# Altium PCB PCB1.PcbDoc
Units mil, origin at the board's own origin, x right, y up, seen from the top; angles counter-clockwise.
Board outline 3149.61 x 1574.8 mil, 2 copper layers (Top Layer, Bottom Layer); 15 components, 12 nets, 41 pads, 0 vias.
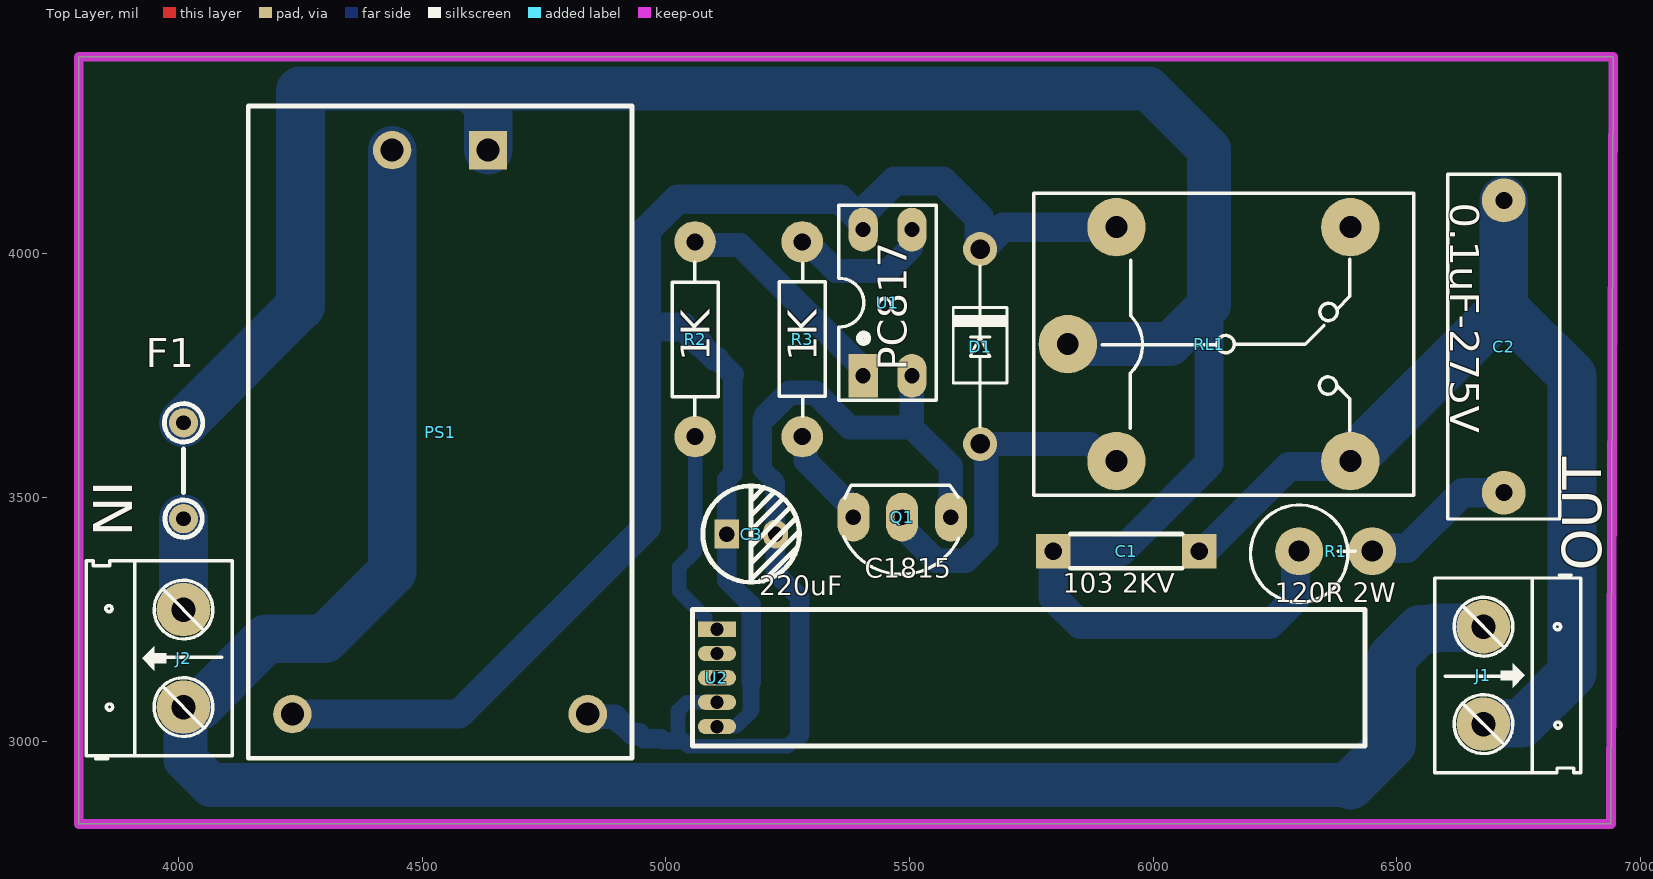
[diagram p0: Top Layer view]
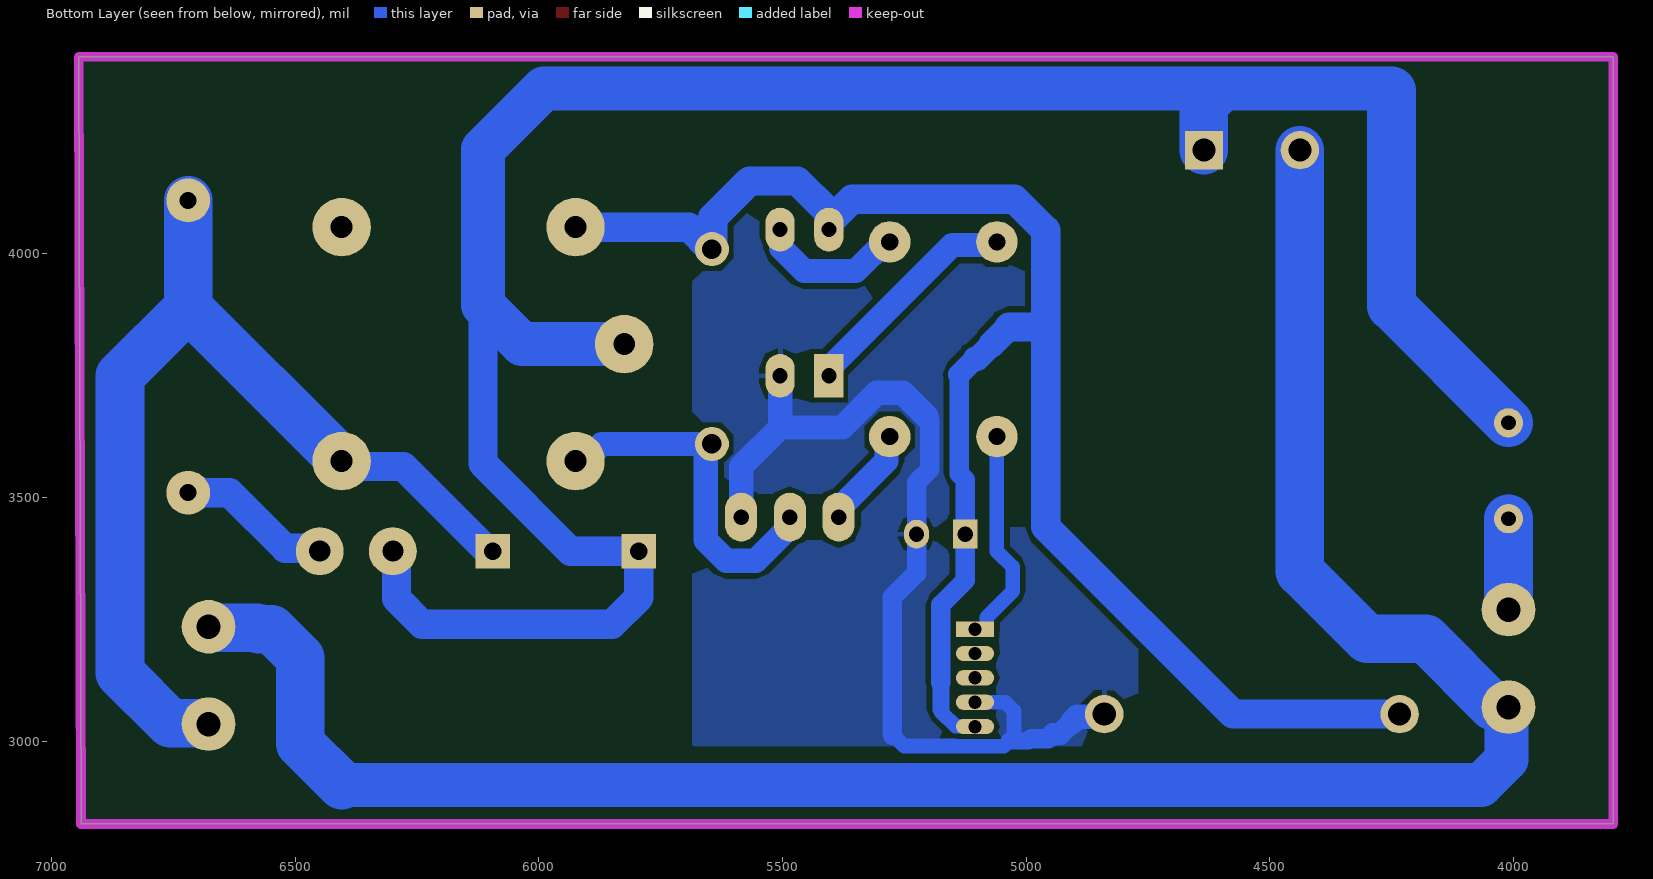
[diagram p1: Bottom Layer view, seen from below]
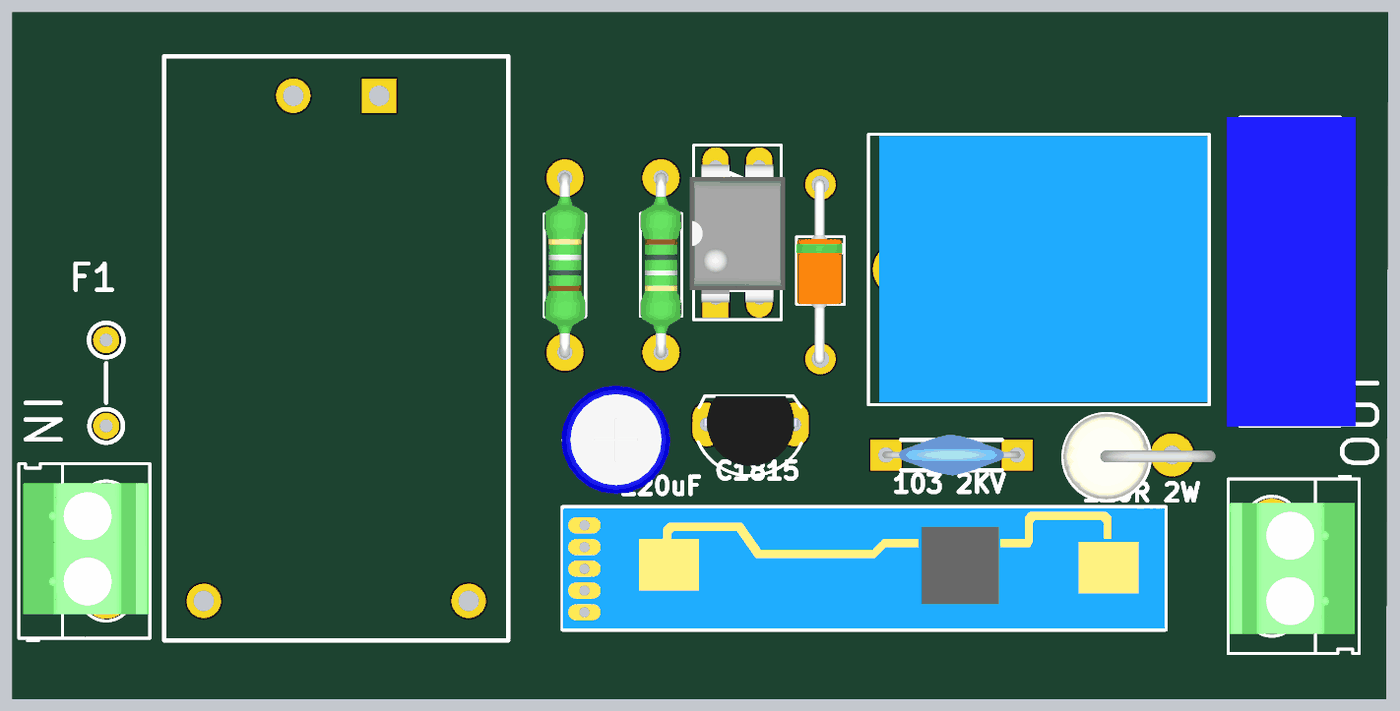
[diagram p2: 3D render of the assembled board from above, using the file's embedded part models]

## Layer stack, top to bottom
Top Solder: solder mask 0.4, Solder Resist, Dk 3.5
Top Layer: signal copper 1.4
Dielectric 1: dielectric 12.6, FR-4, Dk 4.8
Bottom Layer: signal copper 1.4
Bottom Solder: solder mask 0.4, Solder Resist, Dk 3.5

## Board outline
3795,2830 3795,4404.8 6944.61,4404.8 6940,2830

## Design rules (kind name [scope] priority, off if disabled: settings)
Clearance [All] p1: gap=10 ignorepadtopadclearanceinfootprint=FALSE ismatrix=TRUE
PolygonConnect [All] p1: connectstyle=Relief reliefconductorwidth=10 reliefentries=4 polygonreliefangle="90 Angle" airgapwidth=10
RoutingLayers [All] p1: top layer_v5=FALSE bottom layer_v5=TRUE
RoutingVias [All] p1: holewidth=28 width=50 viastyle="Through Hole" minholewidth=28 minwidth=50 maxholewidth=28 maxwidth=50
SolderMaskExpansion [All] p1: expansion=4 istentingtop=FALSE
Width MaxMinWidth_1 [InNet('NetC1_2')] p1: maxlimit=100 minlimit=40 preferedwidth=100 minimp=50.000000 maximp=50.000000 favimp=50.000000
Width MaxMinWidth_2 [InNet('AC1')] p2: maxlimit=100 minlimit=40 preferedwidth=80 minimp=50.000000 maximp=50.000000 favimp=50.000000
Width MaxMinWidth_3 [InNet('AC2')] p3: maxlimit=100 minlimit=40 preferedwidth=80 minimp=50.000000 maximp=50.000000 favimp=50.000000
Width MaxMinWidth_4 [InNet('NetC2_1')] p4: maxlimit=100 minlimit=40 preferedwidth=80 minimp=50.000000 maximp=50.000000 favimp=50.000000
Width MaxMinWidth_5 [InNet('NetF1_1')] p5: maxlimit=100 minlimit=30 preferedwidth=80 minimp=50.000000 maximp=50.000000 favimp=50.000000
Width [All] p6: maxlimit=60 minlimit=30 preferedwidth=50
29 further rules are at their usual default settings.

## Components (designator, comment, footprint, x,y, rotation, side; value= is the part's Value field where it differs from the comment)
C1 "103 2KV" "Cap 7.5mm" 5795,3390 r0 top
C2 "0.1uF-275V" "Cap 15mm" 6720,4110 r270 top
C3 "220uF" "Tu hoa 5mm" 5175,3425 r0 top
D1 "Diode" DIO-1A 5645,3610 r90 top value=1N5007
F1 "10A" "Fuse vertical" 4010,3555 r90 top value=Fuse
J1 "CON 2 KF301" "Con 2 KF301 5.08" 6678.22,3235 r270 top
J2 "CON 2 KF301" "Con 2 KF301 5.08" 4010,3070 r90 top
PS1 "HLK-PM01 5V" CONV_HLK-PM01 4536.57,4213.03 r270 top
Q1 "C1815" TO92-123 5485,3460 r180 top
R1 "120R 2W" R2WD 6500,3390 r180 top
R2 "1K" RES-1/4W 5055,3810 r270 top
R3 "1K" RES-1/4W 5285,3840 r90 top
RL1 "Relay 10A/12V" "RELAY 5" 6150,3815 r0 top value="Relay SPDT, 10A, 12V"
U1 "PC817" DIP4 5405,3747.48 r0 top
U2 "HLK-LD2410" HLK-LD2410 5125,3335 r270 top

## Footprints (in the part's own frame and the unit in brackets; to place one, negate y for a bottom-side part, rotate by r counter-clockwise, add the part's x,y. Pads: shape width x height; smd on the part's side, far side on the other; paste and mask are expansions set on the pad)
"Cap 7.5mm" [mm] "103 2KV"
  rect 1.8x1.8 hole 0.9: 1(0,0) 2(7.62,0)
  silkscreen extent 0.89,-0.89 6.73,0.89, body extent -0.19,-1.2 7.81,1.19, height 9.03
"Cap 15mm" [mil]
  round 90 hole 35: 1(0,0) 2(600,0)
  silkscreen extent -54,-115 654,115, body extent -54,-145 654,150, height 731
"Con 2 KF301 5.08" [mil]
  round 110 hole 50: 1(0,0) 2(200,0)
  silkscreen extent -106,-100 300,200, body extent -45,-97 255,190, height 335
CONV_HLK-PM01 [mm]
  rect 2x2 hole 1.2: 1(0,2.5)
  round 2 hole 1.2: 2(0,-2.5) 3(29.4,7.7) 4(29.4,-7.7)
  silkscreen extent -2.3,-10 31.7,10, body extent -2.29,-10.1 31.71,10.1, height 15.3
DIO-1A [mil]
  round 70 hole 40: 1(0,0) 2(400,0)
  silkscreen extent 35,-55 365,55, body extent -11,-50 411,54, height 102
DIP4 [mil] "W.300/L.400"
  rect 60x90 hole 31: 1(0,2.52)
  oval 60x90 hole 31: 2(100,2.52) 3(100,302.52) 4(0,302.52)
  silkscreen extent -50,-47 150,353, body extent -59,-7 159,307, height 170
"Fuse vertical" [mil] "d=5mm"
  round 60 hole 30: 1(-98.43,0) 2(98.43,0)
  silkscreen extent -137,-40 138,39, body extent -73,-85 183,88, height 650
HLK-LD2410 [mm]
  rect 0.8x2 hole 0.7: 1(2.667,-0.508)
  oval 0.8x2 hole 0.7: 2(3.937,-0.508) 3(5.207,-0.508) 4(6.477,-0.508) 5(7.747,-0.508)
  silkscreen extent 1.65,-1.78 8.76,33.27, body extent 1.71,-1.78 8.71,33.22, height 2.1
R2WD [mm] "R2W, 2 pin, 150mil"
  round 2.5 hole 1.1: 1(1.27,0) 2(5.08,0)
  silkscreen extent 2.16,-2.41 7.62,2.66, body extent -1.25,-2.41 7.6,2.59, height 13.97
"RELAY 5" [mil] "Reley DPDT, 8 pin, 1A, W400mil, L800mil,H 300mil"
  round 120 hole 45: 1(-325,0) 2(255,240) 3(255,-240) 4(-225,-240) 5(-225,240)
  silkscreen extent -395,-310 385,310, body extent -371,-304 381,306, height 602
RES-1/4W [mil]
  round 85 hole 35: 1(-215,5) 2(185,5)
  silkscreen extent -173,-42 141,52, body extent -227,-42 197,52, height 95
TO92-123 [mil] "TO-92"
  oval 66x100 hole 32: 1(-100,0) 2(0,0) 3(100,0)
  silkscreen extent -117,-65 120,118, body extent -109,-66 109,95, height 245
"Tu hoa 5mm" [mm]
  rect 1.3x1.5 hole 0.8: 1(-1.27,0)
  oval 1.3x1.5 hole 0.8: 2(1.27,0)
  silkscreen extent -2.51,-2.51 2.51,2.51, body extent -3.12,-3.18 3.23,3.18, height 14.55

## Part data
C1: library part "Cap 103 2KV", "Capacitor Ceramic 2KV"
C2: library part CN, "Capacitor"
C3: library part "Tu Hoa 220uF 16V 6x11", "Cắm", Chung_Loai=Cắm, Don_Vi=Con, Ma_Hang=MH001348, So_Chan=2, Ten_Linh_Kien="Tụ Hóa 220uF 16V 6x11MM"
D1: "Default Diode", Code - JEDEC=DO-214-AB, Published=8-Jun-2000, Publisher="Altium Limited", Revision="July-2002: Re-released for DXP Platform."
F1: library part Fuse, "Fuse", Designed by=VanDungEvn
J1 J2: "Cắm", Chung_Loai=Cắm, Don_Vi=Con, Ma_Hang=MH000987, Ten_Linh_Kien="CON 2 KF301-2P 5.08MM Xanh Dương"
PS1: library part "CONV HLK-PM01", "220VAC to 5V 3W", Package="Non-Standard Hi-link", Availability="Not in stock", Check_prices=https://www.snapeda.com/parts/HLK-20M12/Hi-link/view-part/?ref=eda, MF=Hi-link, MP=HLK-20M12, Price=None, SnapEDA_Link=https://www.snapeda.com/parts/HLK-20M12/Hi-link/view-part/?ref=snap
Q1: library part 2SC1815, "NPN 600mW, ECB"
R1 R2 R3: library part Res
RL1: library part "Relay 5", "Relay SPDT,10A - 12VDC 5 Pin"
U1: library part "OPTO PC817 DIP4", "Single Opto"
U2: "HLK-LD2410B-P Cam bien hien dien"

## Nets (pads, with @x,y where several pads share a name; then routed paths per layer and width w, separated by ;. In a path a pad name is that pad's centre, name@x,y a point inside that pad or via, vN(x,y) a via of type N, cw(c..) or ccw(c..) an arc to the next point about the centre after c; other vN are vias at no path point)
+5: C3.1 D1.2 PS1.4 RL1.5 U1.4 U2.5 | length 3703.3
  Bottom Layer w30: U2.5 5105.29,3030.29 5144.71,3030.29 5175,3060.57 5175,3065.57
  Bottom Layer w35: 5175,3065.57 5175,3120
  Bottom Layer w40: 5137.5,3752.5 5137.5,3549.27 5125,3536.77 C3.1 5125,3330 5175,3280 5175,3120
  Bottom Layer w45: 5105,3785 5137.5,3752.5
  Bottom Layer w50: 5070,3815 5100,3785 5105,3785
  Bottom Layer w55: 5035,3850 5070,3815
  Bottom Layer w60: PS1.4@4233.7,3055.55 4575.55,3055.55 4960,3440 4960,3860 ; 5035,3850 4970,3850 4960,3860 ; U1.4 U1.4@5405,4065 ; RL1.5 5692.71,4055 5647.71,4010 D1.2 5643.09,4011.91 5643.09,4074.85 5567.94,4150 5470,4150 5405,4085 U1.4@5405,4065 ; 4960,3860 4960,4048.74 5023.76,4112.5 5357.5,4112.5 U1.4@5405,4065
AC1: C1.1 F1.2 PS1.1 R1.2 RL1.1 | length 4954.1
  Bottom Layer w60: 6115,3895 6115,3570 5935,3390 C1.1 5795,3295 5850,3240 6240,3240 6292.65,3292.65 6292.65,3382.65 R1.2
  Bottom Layer w80: RL1.1 RL1.1@5832.65,3807.35
  Bottom Layer w90: 4250,4334.8 4255,4339.8 4595.2,4339.8 ; 4635.28,4299.72 4595.2,4339.8 ; RL1.1 6035,3815 6115,3895 6115,4215 5990.2,4339.8 4595.2,4339.8
  Bottom Layer w100: F1.2 4250,3893.43 4250,4334.8 ; PS1.1@4635.28,4213.03 4635.28,4299.72
AC2: J1.1 J2.1 PS1.2 | length 4441.4
  Bottom Layer w90: J2.1 4013.83,3066.17 4013.83,2962.72 4066.55,2910 6405,2910
  Bottom Layer w100: J2.1 4011.91,3071.91 4041.91,3071.91 4180,3210 4300,3210 4438.43,3348.43 PS1.2@4438.43,4213.03 ; 6405,2910 6490,2995 6490,3171.42 6548.58,3230 6575,3230 6578.09,3233.09 6676.31,3233.09 J1.1
GND: C3.2 PS1.3 Q1.1 U1.2 U2.4 | length 1976.8
  Bottom Layer w30: 5025,3000 5025,3062.14 5042.57,3079.71 5104.71,3079.71 U2.4 ; 5035,3000 5045.75,2989.25 5145.5,2989.25 5146.25,2990 5250,2990 5275,3015
  Bottom Layer w35: 4990,3005 4995,3000 5035,3000 ; 5275,3010 5275,3015
  Bottom Layer w40: 4945,3015 4955,3005 4990,3005 ; 5197.5,3659.17 5197.5,3558.08 5225,3530.58 C3.2 5225,3345 5275,3295 5275,3015
  Bottom Layer w45: 4905,3040 4930,3015 4945,3015
  Bottom Layer w50: PS1.3 4845.22,3050.05 4894.95,3050.05 4905,3040 ; 5205,3666.67 5253.33,3715 5306.67,3715 5377.74,3643.93 5505,3643.93 ; U1.2 5505,3643.93 ; Q1.1 5585,3563.93 5505,3643.93
IN: R2.2 U2.1 | length 462.7
  Bottom Layer w30: R2.2@5080,3625 5060,3605 5060,3390 5027.5,3357.5 5027.5,3307.5 5080.63,3254.37 5080.63,3230.75 5081.38,3230 U2.1
NetC1_2: C1.2 C2.1 J1.2 RL1.3 | length 2085.4
  Bottom Layer w60: C1.2 6100.43,3395.43 6110.43,3395.43 6278.52,3563.52 6393.52,3563.52 RL1.3
  Bottom Layer w100: RL1.3 6720,3890 ; J1.2 6680.14,3036.91 6756.91,3036.91 6860,3140 6860,3750 6720,3890 ; C2.1 6720,3890
NetC2_2: C2.2 R1.1 | length 319.7
  Bottom Layer w60: R1.1 6455.94,3395.94 6520.94,3395.94 6635,3510 C2.2
NetD1_1: D1.1 Q1.2 RL1.4 | length 713.2
  Bottom Layer w50: Q1.2 5485,3439.76 5554.76,3370 5615.24,3370 5658,3412.76 D1.1@5658,3591.59 ; D1.1 5871.06,3610 5906.06,3575 RL1.4
NetF1_1: F1.1 J2.2 | length 186.6
  Bottom Layer w100: J2.2 F1.1
NetQ1_3: Q1.3 R3.1 | length 208.5
  Bottom Layer w50: R3.1 5286.7,3618.3 5286.7,3575.3 5385,3477 Q1.3
NetR2_1: R2.1 U1.1 | length 467.7
  Bottom Layer w50: R2.1 5066.7,4018.3 5151.7,4018.3 5405,3765 U1.1
NetR3_2: R3.2 U1.3 | length 306
  Bottom Layer w50: R3.2 5289.47,4025 5349.47,3965 5455.71,3965 5503.09,4012.38 5503.09,4048.09 U1.3
pads on no net: RL1.2 U2.2 U2.3

## Polygon pours and split planes (outlines as drawn)
GND on Bottom Layer "GND_L02_P000" (solid, remove dead copper, pour order 0): 5685,4195 5685,3775 5685,3590 5685,3505 5685,2985 5680,2990 4770,2990 4770,4180 4755,4195

## Keep-outs
Keep-Out Layer:
  the board outline again, w20

## Silkscreen, mask and mechanical layers (free items; w line width, h text height)
Top Overlay:
  text "IN" at 3825,3535 h80 r270
  text "OUT" at 6920,3350 h80 r90